# Altium PCB HB100_and_neo_m6.PcbDoc
Units mm, origin at the board's own origin, x right, y up, seen from the top; angles counter-clockwise.
Board outline 90.17 x 98.55 mm, 2 copper layers (Top Layer, Bottom Layer); 35 components, 23 nets, 163 pads, 8 vias.
Unrouted connection lines stored in the file: 3.
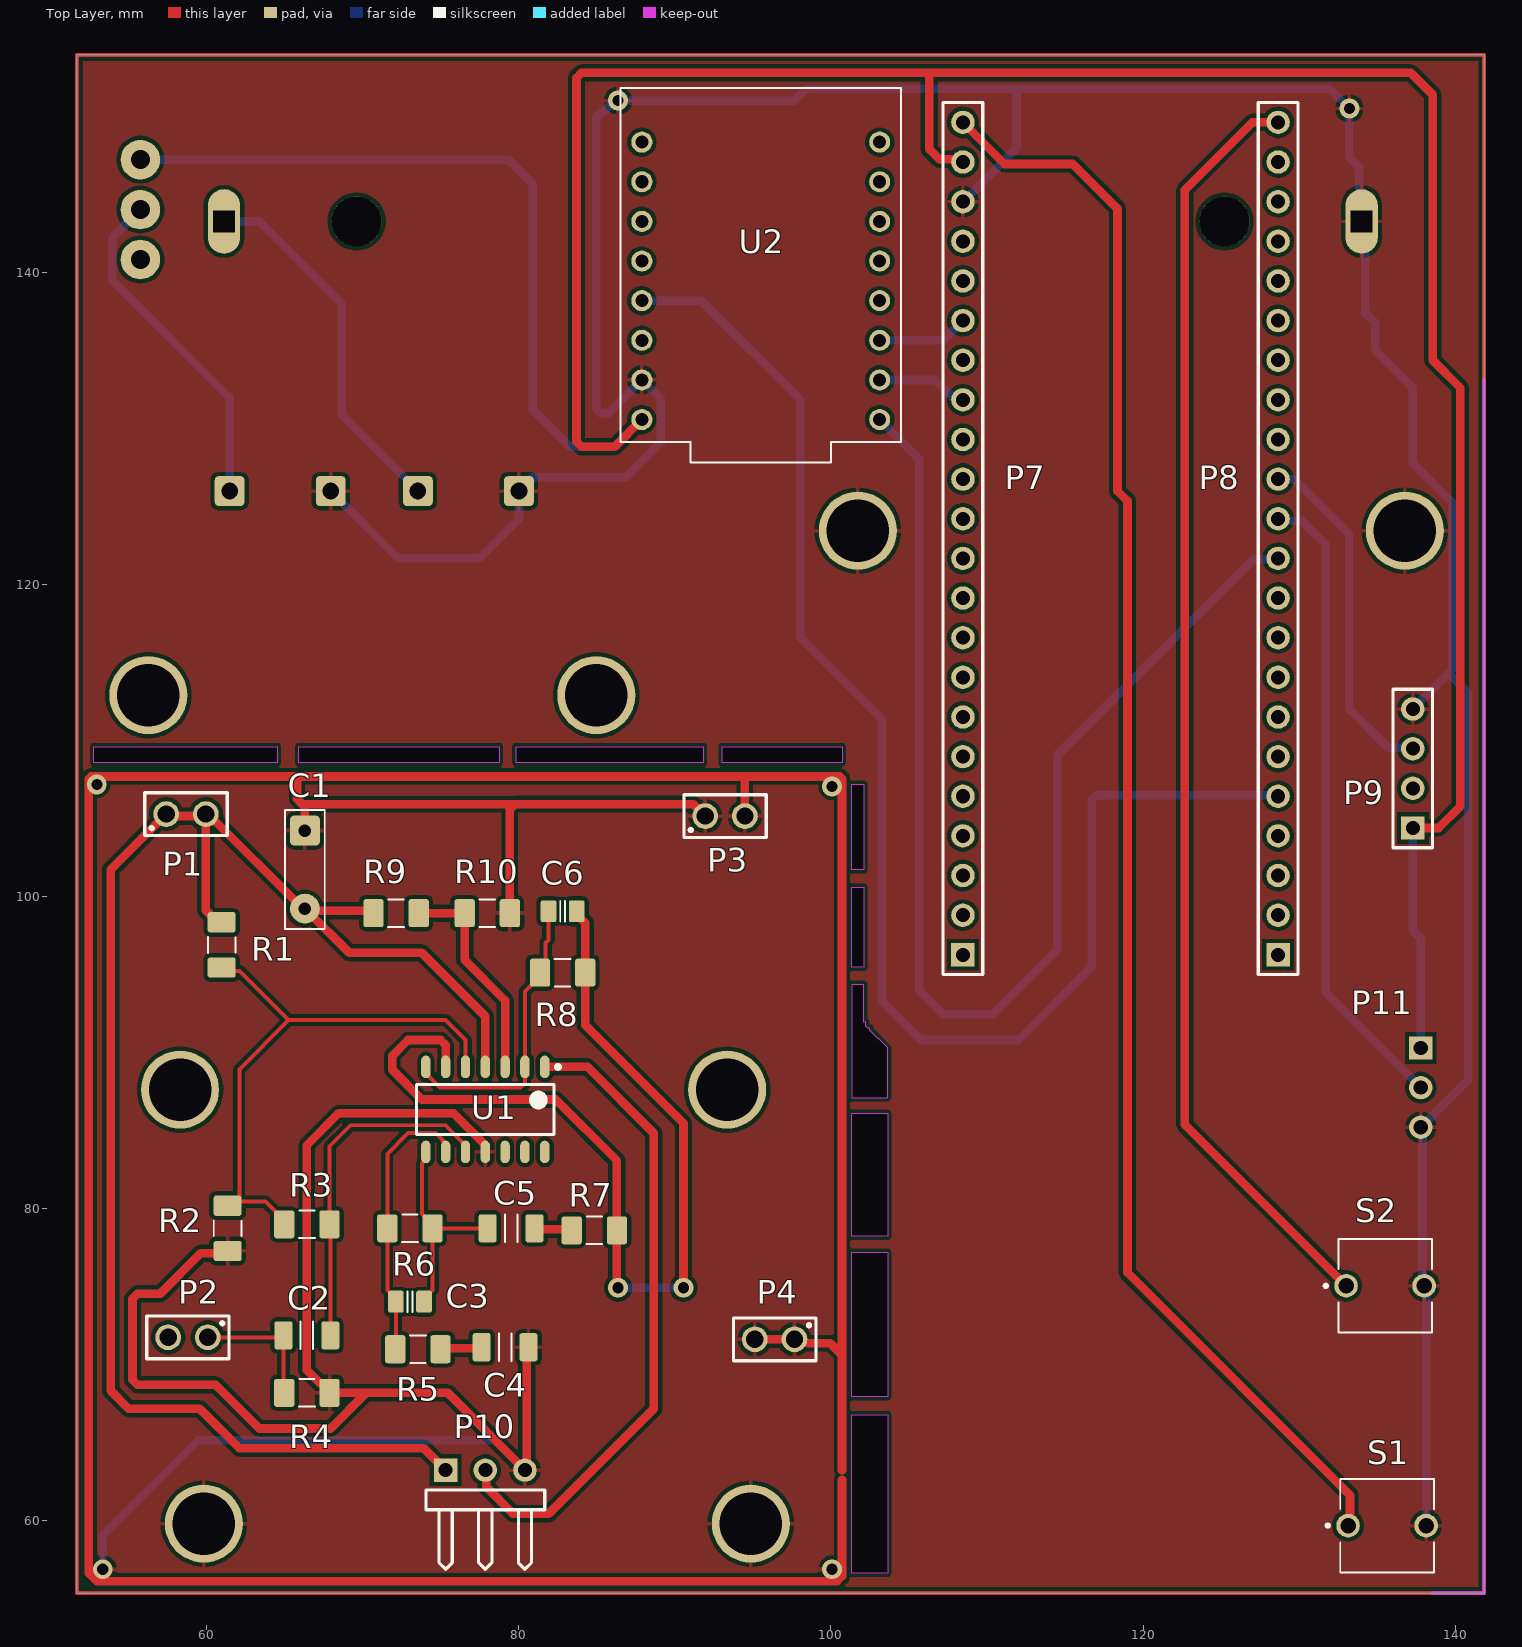
[diagram p0: Top Layer view]
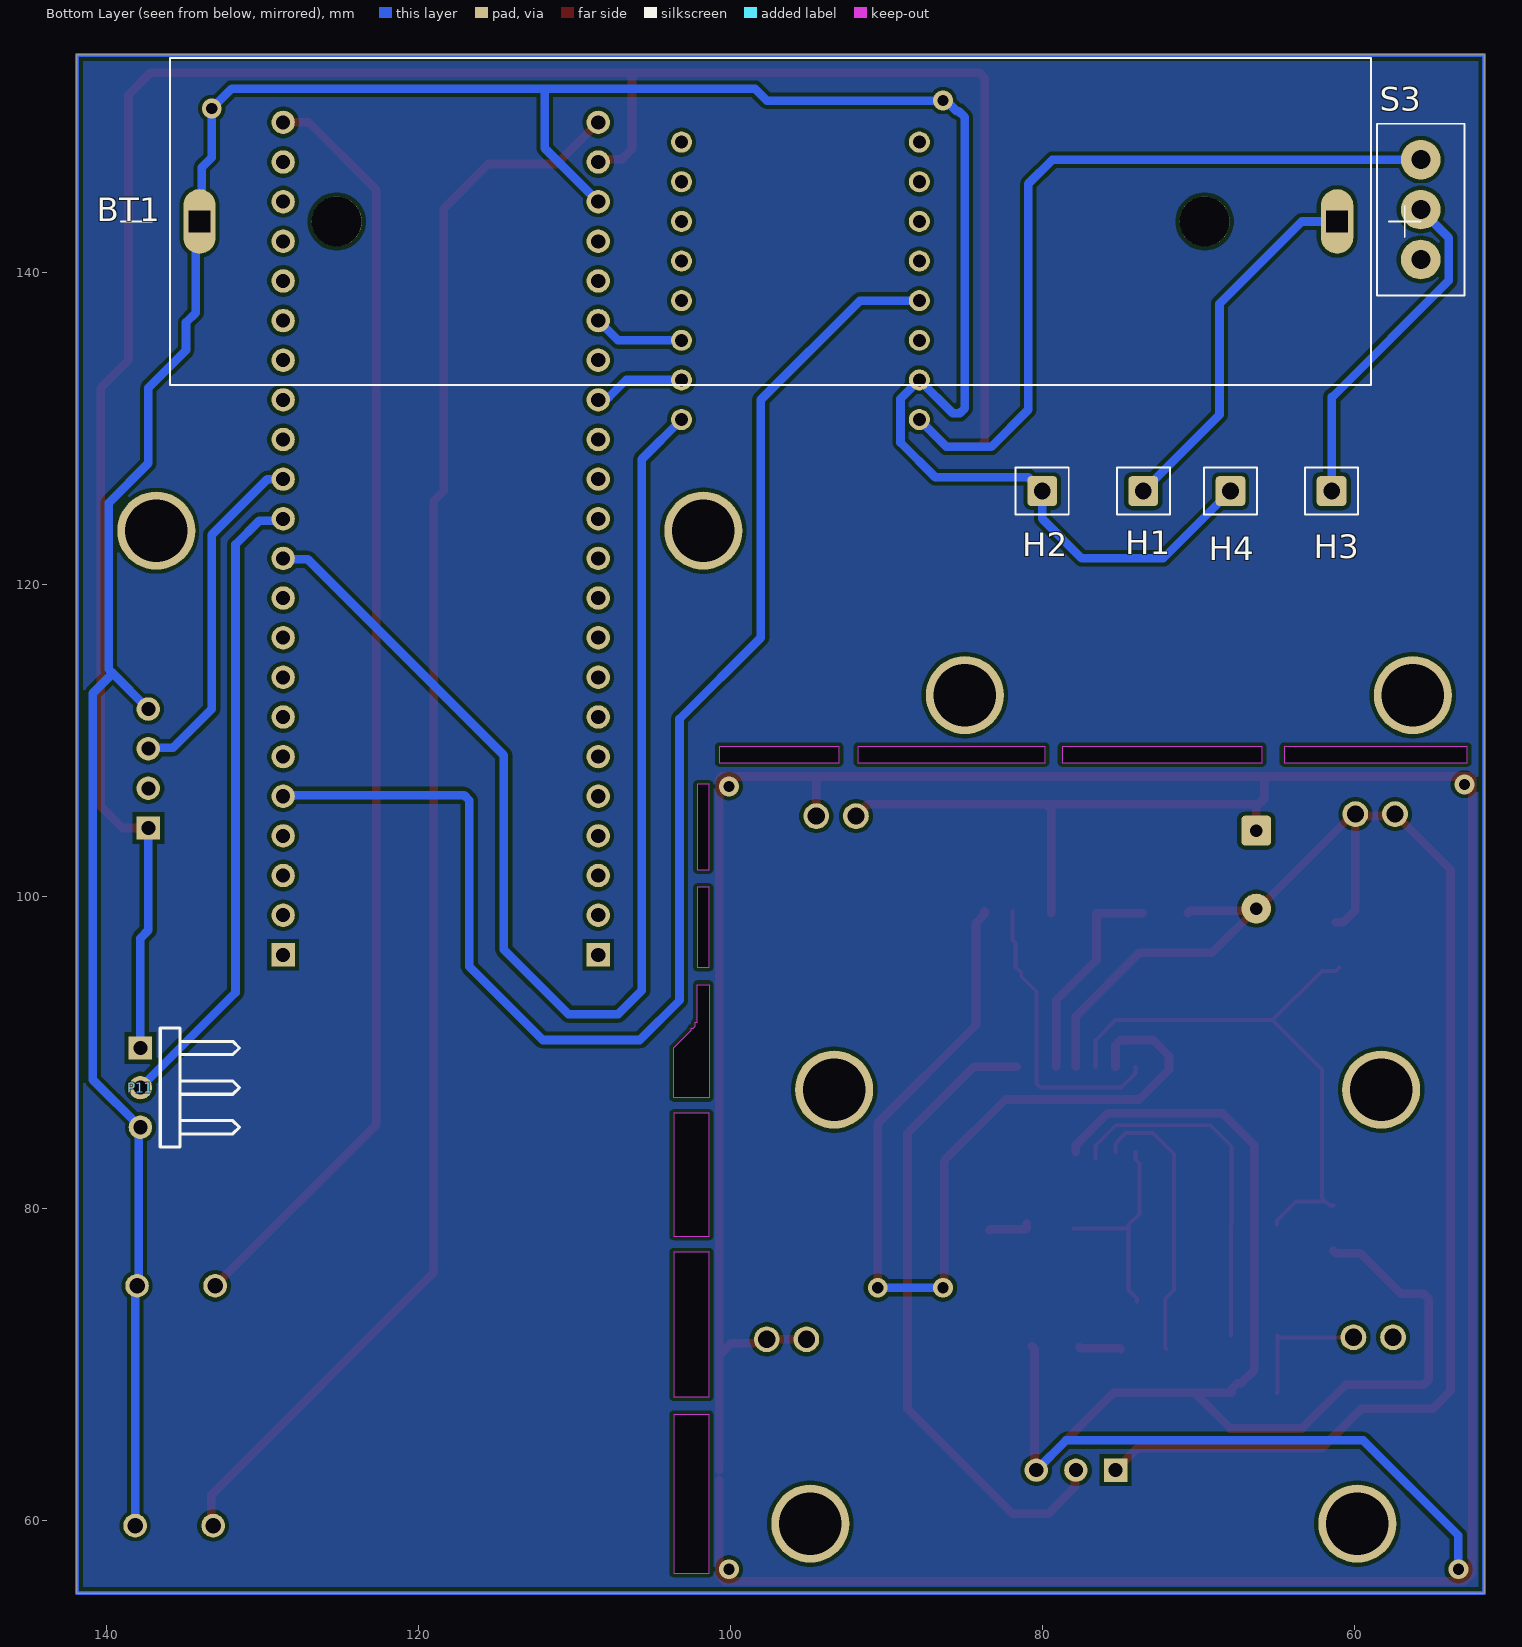
[diagram p1: Bottom Layer view, seen from below]

## Layer stack, top to bottom
Top Solder: solder mask 0.0102, Solder Resist, Dk 3.5
Top Layer: signal copper 0.0356
Dielectric 1: dielectric 0.32, FR-4, Dk 4.8
Bottom Layer: signal copper 0.0356
Bottom Solder: solder mask 0.0102, Solder Resist, Dk 3.5

## Board outline
51.689,55.372 51.689,153.924 141.859,153.924 141.859,55.372
cut-out: 101.346,107.188 102.108,107.188 102.108,101.727 101.346,101.727
cut-out: 101.346,100.584 102.108,100.584 102.108,95.472 101.346,95.472
cut-out: 101.346,66.802 103.632,66.802 103.632,56.642 101.346,56.642
cut-out: 101.346,77.216 103.632,77.216 103.632,67.945 101.346,67.945
cut-out: 101.346,86.106 103.632,86.106 103.632,78.232 101.346,78.232
cut-out: 100.711,109.601 100.711,108.585 93.027,108.585 93.027,109.601
cut-out: 91.821,109.601 91.821,108.585 79.819,108.585 79.819,109.601
cut-out: 78.74,109.601 78.74,108.585 65.913,108.585 65.913,109.601
cut-out: 64.516,109.601 64.516,108.585 52.768,108.585 52.768,109.601
cut-out: 101.346,94.361 101.346,87.122 103.632,87.122 103.632,90.297 102.489,91.44 102.489,91.567 102.362,91.567 102.235,91.694 102.235,91.948 102.108,91.948 102.108,94.361

## Design rules (kind name [scope] priority, off if disabled: settings)
Clearance [All] p1: gap=0.254 ignorepadtopadclearanceinfootprint=FALSE except(0: Arc-Hole Track-Hole SMDPad-Hole THPad-Hole Via-Hole Fill-Hole Poly-Hole Region-Hole Text-Hole)
PolygonConnect [All] p1: connectstyle=Relief reliefconductorwidth=0.254 reliefentries=4 polygonreliefangle="90 Angle" airgapwidth=0.254
RoutingVias [All] p1: holewidth=0.711 width=1.27 viastyle="Through Hole" minholewidth=0.711 minwidth=1.27 maxholewidth=0.711 maxwidth=1.27
SilkToSolderMaskClearance [IsText] p1: minsilkscreentomaskgap=0.254 clearancetoexposedcopper=TRUE
SolderMaskExpansion [All] p1: expansion=0.102 istentingtop=FALSE
Width [All] p1: maxlimit=0.554 minlimit=0.254 preferedwidth=0.254 minimp=50.000000 maximp=50.000000 favimp=50.000000
29 further rules are at their usual default settings.

## Components (designator, comment, footprint, x,y, rotation, side; value= is the part's Value field where it differs from the comment)
BT1 "BK-18650-PC2" BAT_BK-18650-PC2 97.409,143.256 r0 bottom
C1 "approved sub OK" CAPC500P450250X550 66.294,101.727 r270 top value=10n
C2 "approved sub OK" CAPC3216X180N 66.421,71.882 r0 top value=1u
C3 "approved sub OK" CAPC2012X135N 73.025,74.041 r0 top value=2n2
C4 "approved sub OK" CAPC3216X180N 79.121,71.12 r180 top value=4u7
C5 "approved sub OK" CAPC3216X180N 79.502,78.74 r0 top value=4u7
C6 "approved sub OK" CAPC2012X135N 82.804,99.06 r0 top value=2n2
H1 "Header 1" HEAD1 73.533,125.984 r180 bottom
H2 "Header 1" HEAD1 80.01,125.984 r180 bottom
H3 "Header 1" HEAD1 61.468,125.984 r180 bottom
H4 "Header 1" HEAD1 67.945,125.984 r180 bottom
P1 "Header 2" 61300211121 58.674,105.283 r0 top
P2 "Header 2" 61300211121 58.801,71.755 r180 top
P3 "Header 2" 61300211121 93.218,105.156 r0 top
P4 "Header 2" 61300211121 96.393,71.628 r180 top
P7 "Header 22" HDR1X22 108.458,96.266 r90 top
P8 "Header 22" HDR1X22 128.651,96.266 r90 top
P9 "*Header" HDR1X4 137.287,104.394 r90 top
P10 "Header 3H" HDR1X3H 75.311,63.246 r0 top
P11 "Header 3H" HDR1X3H 137.795,90.297 r270 bottom
R1 "Thick Film" RESC3216N_ZERO 60.96,96.901 r270 top value=100K
R2 "Thick Film" RESC3216N_ZERO 61.341,78.74 r270 top value=100K
R3 "Thick Film" RESC3216N_ZERO 66.421,78.994 r0 top value=100K
R4 "Thick Film" RESC3216N_ZERO 66.421,68.199 r0 top value=10K
R5 "Thick Film" RESC3216N_ZERO 73.533,70.993 r180 top value=10K
R6 "Thick Film" RESC3216N_ZERO 73.025,78.74 r0 top value=1M
R7 "Thick Film" RESC3216N_ZERO 84.836,78.613 r0 top value=10K
R8 "Thick Film" RESC3216N_ZERO 82.804,95.123 r180 top value=1M
R9 "Thick Film" RESC3216N_ZERO 72.136,98.933 r0 top value=10K
R10 "Thick Film" RESC3216N_ZERO 77.978,98.933 r0 top value=1K
S1 "BUTT-2" SW_BUTT-2 135.636,59.69 r0 top
S2 "BUTT-2" SW_BUTT-2 135.509,75.057 r0 top
S3 "ON-ON" SWITCH_SPDT_SLIDER 55.753,144.018 r270 bottom
U1 "LM324" SOIC127P600X175-14N-LM324 77.851,86.36 r270 top
U2 "ESP32-C3_SUPERMINI_TH" MODULE_ESP32-C3_SUPERMINI_TH 95.504,140.462 r180 top

## Footprints (in the part's own frame and the unit in brackets; to place one, negate y for a bottom-side part, rotate by r counter-clockwise, add the part's x,y. Pads: shape width x height; smd on the part's side, far side on the other; paste and mask are expansions set on the pad)
61300211121 [mm]
  round 1.65 hole 1.1: 1(-1.27,0) 2(1.27,0)
  silkscreen extent -2.64,-1.37 2.64,1.37
BAT_BK-18650-PC2 [mm]
  oval 2.07x4.14 hole 1.38 square mask+0.102: NEG(36.6,0) POS(-36.3,0)
  round 3.2 hole 3.2 unplated mask+0: ""(-27.805,0) ""(27.81,0)
  silkscreen extent -41.63,-10.49 41.63,10.49, body extent -38.48,-10.49 38.48,10.49, height 24.71
CAPC500P450250X550 [mm] "TDK FK24 radial ceramic capacitor"
  round 0.508 on Mech15: 0(0,0)
  rrect25% 1.905x1.905 hole 0.8: 1(-2.5,0)
  round 1.905 hole 0.8: 2(2.5,0)
  silkscreen extent -3.81,-1.27 3.81,1.27, body extent -2.8,-1 2.8,1, height 5.47
CAPC2012X135N [mm] "Chip Capacitor, Body 2.0x1.2mm, EIA 0805, IPC Medium Density"
  round 0.254 on Mech15: 0(0,0)
  rrect25% 1x1.4 smd: 1(-0.9,0) 2(0.9,0)
  Top Layer pour cut-out: -0.675,0.7 -0.475,0.9 0.475,0.9 0.675,0.7 0.675,-0.7 0.475,-0.9 -0.475,-0.9 -0.675,-0.7
  silkscreen extent -0.15,-0.65 0.15,0.65, body extent -1.1,-0.72 1.1,0.73, height 1.34
CAPC3216X180N [mm] "Chip Capacitor, Body 3.2x1.6mm, 1.8mm H, EIA 1206, IPC Medium Density"
  round 0.508 on Mech15: 0(0,0)
  rrect25% 1.15x1.8 smd: 1(-1.5,0) 2(1.5,0)
  silkscreen extent -0.4,-0.88 0.4,0.88, body extent -1.7,-0.9 1.7,0.9, height 1.8
HDR1X3H [mm] "Connector; Header; 3 Position; Right Angle"
  rect 1.5x1.5 hole 0.9: 1(0,0)
  round 1.5 hole 0.9: 2(2.54,0) 3(5.08,0)
  silkscreen extent -1.27,-6.35 6.35,-1.27, body extent -1.27,-7 6.35,1.27, height 4.33
HDR1X4 [mm] "Connector; Header; 4 Position"
  rect 1.5x1.5 hole 0.9: 1(0,0)
  round 1.5 hole 0.9: 2(2.54,0) 3(5.08,0) 4(7.62,0)
  silkscreen extent -1.27,-1.27 8.89,1.27, body extent -1.38,-1.22 9.03,1.28, height 3.22
HDR1X22 [mm] "Connector; Header; 22 Position"
  rect 1.5x1.5 hole 0.9: 1(0,0)
  round 1.5 hole 0.9: 2(2.54,0) 3(5.08,0) 4(7.62,0) 5(10.16,0) 6(12.7,0) 7(15.24,0) 8(17.78,0) 9(20.32,0) 10(22.86,0) 11(25.4,0) 12(27.94,0) 13(30.48,0) 14(33.02,0) 15(35.56,0) 16(38.1,0) 17(40.64,0) 18(43.18,0) 19(45.72,0) 20(48.26,0) 21(50.8,0) 22(53.34,0)
  silkscreen extent -1.27,-1.27 54.61,1.27
HEAD1 [mil] "Connector Socket with header, Single-row 1-position, 0.100\" pitch"
  rrect25% 75x75 hole 42: 1(0,0)
  silkscreen extent -67,-59 67,59, body extent -57,-50 57,50, height 408
MODULE_ESP32-C3_SUPERMINI_TH [mm]
  round 1.348 hole 0.84: 0(7.62,-7.88) 1(7.62,-5.34) 2(7.62,-2.8) 3(7.62,-0.26) 3.3(7.62,4.82) 4(7.62,2.28) 5(-7.62,9.9) 5V(7.62,9.9) 6(-7.62,7.36) 7(-7.62,4.82) 8(-7.62,2.28) 9(-7.62,-0.26) 10(-7.62,-2.8) 20(-7.62,-5.34) 21(-7.62,-7.88) G(7.62,7.36)
  silkscreen extent -9,-11.35 9,12.65, body extent -9,-11.35 9,12.65, height 4.16
RESC3216N_ZERO [mm] "Chip Resistor, Body 3.2x1.6mm, 1206, IPC Medium Density"
  round 0.508 on Mech15: 0(0,0)
  rrect25% 1.3x1.8 smd: 1(-1.45,0) 2(1.45,0)
  silkscreen extent -0.51,-0.89 0.51,0.89, body extent -1.62,-0.82 1.63,0.83, height 0.69
SOIC127P600X175-14N-LM324 [mm] "SOIC, 14-Leads, Body 8.65x3.90mm, Pitch 1.27mm, IPC Medium Density"
  oval 1.45x0.6 smd: 1(-2.725,3.81) 2(-2.725,2.54) 3(-2.725,1.27) 4(-2.725,0) 5(-2.725,-1.27) 6(-2.725,-2.54) 7(-2.725,-3.81) 8(2.725,-3.81) 9(2.725,-2.54) 10(2.725,-1.27) 11(2.725,0) 12(2.725,1.27) 13(2.725,2.54) 14(2.725,3.81)
  silkscreen extent -2.85,-4.4 1.6,4.79, body extent -3,-4.4 3,4.4, height 1.75
SW_BUTT-2 [mm]
  round 1.508 hole 1 mask+0.102: 1(-2.5,0) 2(2.5,0)
  silkscreen extent -3.9,-3 3,3, body extent -3,-3 3,3, height 5.1
SWITCH_SPDT_SLIDER [mil] "TE Connectivity SLS121PC04 SPDT slider"
  round 100 hole 48: 1(-126,0) 2(0,0) 3(126,0)
  silkscreen extent -217,-110 217,110, body extent -216,-110 217,110, height 394

## Part data
BT1: "Battery Holder (Open) 18650 1 Cell PC Pin", Package="DFN-14 MPD (Memory Protection Devices)", Check_prices=https://www.snapeda.com/parts/BK-18650-PC2/MPD/view-part/?ref=eda, MF="MPD (Memory", MP=BK-18650-PC2, SnapEDA_Link=https://www.snapeda.com/parts/BK-18650-PC2/MPD/view-part/?ref=snap
C1: library part CAPR_220n_Radial_5mm, "Capacitor Ceramic 220nF 10% 50V X7R radial 5mm lead spacing", Manufacturer 1="TDK Corporation", Manufacturer Part Number 1=FK24X7R1H224K, Operating Temperature="-55°C ~ 125°C", Package / Case="0.217\" L x 0.177\" W (5.50mm x 4.50mm) radial 5mm LS", Ratings="50V; X7R", Supplier Part Number 1=445-2855-ND, Tolerance=±10%, ComponentLink1Description="e4941_fk datasheet", ComponentLink1URL=http://www.tdk.co.jp/tefe02/e4941_fk.pdf, Material=ceramic, SCDType=spec, Supplier 1=Digi-Key
C2 C4 C5: library part "CAP C_1206", "Capacitor SMD Cer 220nF 10% 16V X7R 1206", Manufacturer 1=Murata, Manufacturer Part Number 1=GRM319R71C224KA01D, Package / Case="1206 (3216 metric)", Ratings="16V; X7R", Supplier Part Number 1=81-GRM426X224K016D, Tolerance=±10%, SCDType=spec, Supplier 1=Mouser
C3 C6: library part "CAP C_0805", "Capacitor SMD Cer 1.8nF 10% 50V X7R 0805", Manufacturer 1="AVX Corporation", Manufacturer Part Number 1=08055C182KAT2A, Operating Temperature="-55°C ~ 125°C", Package / Case="0805 (2012 metric)", Ratings="50V; X7R", Supplier Part Number 1=478-1374-1-ND, Tolerance=±10%, SCDType=source*, Supplier 1=Digi-Key
H1 H2 H3 H4: "Header, 1-Pin, Right Angle", Published=6-May-2014, Publisher="Cynetik Group", Revised="Zion Blue"
P1 P2 P3 P4: library part 6130XX11121_61300211121, Package=None, Availability=Unavailable, MF="{'manufacturer': u'Wurth Electronics'}", MP=61300211121, Price=None
P7 P8: "Header, 22-Pin", LatestRevisionDate=17-Jul-2002, LatestRevisionNote="Re-released for DXP Platform.", Publisher="Altium Limited"
P9: library part "Header 4", "Header, 4-Pin, Right Angle", LatestRevisionDate=17-Jul-2002, LatestRevisionNote="Re-released for DXP Platform.", Publisher="Altium Limited"
P10 P11: "Header, 3-Pin, Right Angle", LatestRevisionDate=17-Jul-2002, LatestRevisionNote="Re-released for DXP Platform.", Publisher="Altium Limited"
R1 R2 R3 R4 R5 R6 R7 R8 R9 R10: library part RES_1206, "Resistor SMD chip 0.0 Ohm 0.25W 1206", Manufacturer 1=Vishay/Dale, Manufacturer Part Number 1=CRCW12060000Z0EA, Package / Case="1206 (3216 metric)", Ratings=1/4W, Supplier Part Number 1=541-0.0ECT-ND, Tolerance=±5%, SCDType=spec*\?, Supplier 1=Digi-Key
S1 S2: "Tactile Switches MINI PUSH BUTTON SWITCH 2-PIN QTY. 4", Package=None, Check_prices=https://www.snapeda.com/parts/BUTT-2/Gravitech/view-part/?ref=eda, MF=Gravitech, MP=BUTT-2, SnapEDA_Link=https://www.snapeda.com/parts/BUTT-2/Gravitech/view-part/?ref=snap
S3: library part SW_THD_SPDT_On-On, "Switch THD vertical toggle SPDT", Contact Rating @ Voltage="0.25A @ 125VAC", Manufacturer 1="TE Connectivity", Manufacturer Part Number 1=SLS121PC04, Supplier Part Number 1=450-1598-ND, Circuit=SPDT, Mounting Type="PCB mount", SCDType=spec, Supplier 1=Digi-Key, Switch Function=On-On
U2: "Super tiny ESP32-C3 board", Package=Package, Check_prices=https://www.snapeda.com/parts/ESP32-C3%20SuperMini_TH/Espressif+Systems/view-part/?ref=eda, MF="Espressif Systems", MP="ESP32-C3 SuperMini_TH", SnapEDA_Link=https://www.snapeda.com/parts/ESP32-C3%20SuperMini_TH/Espressif+Systems/view-part/?ref=snap

## Free pads (board coordinates)
  round 5 hole 4: 1(58.293,87.63) 1(59.817,59.817) 2(93.345,87.63) 2(94.869,59.817) 3(101.727,123.444) 4(136.779,123.444) 5(56.261,112.903) 6(84.963,112.903)

## Via types
v1: diameter 1.27, hole 0.711, Top Layer to Bottom Layer, 8 vias

## Nets (pads, with @x,y where several pads share a name; then routed paths per layer and width w, separated by ;. In a path a pad name is that pad's centre, name@x,y a point inside that pad or via, vN(x,y) a via of type N, cw(c..) or ccw(c..) an arc to the next point about the centre after c; other vN are vias at no path point)
3_01_UART_RX: P8.13 P9.3 | length 22.3
  Bottom Layer w0.554: P8.13 129.667,126.746 133.223,123.19 133.223,112.014 135.706,109.531 137.23,109.531 P9.3
3_02_MISO: P7.17 U2.7 | length 5.9
  Bottom Layer w0.554: U2.7 107.194,135.642 P7.17
3_08_MOSI: P7.15 U2.6 | length 5.9
  Bottom Layer w0.554: U2.6 106.674,133.102 107.769,132.007 108.277,132.007 P7.15
3_10_SCLK: P8.5 U2.4 | length 92.6
  Bottom Layer w0.554: U2.4 91.688,138.182 98.044,131.826 98.044,116.586 103.251,111.379 103.251,93.345 105.791,90.805 112.014,90.805 116.713,95.504 116.713,106.158 117.038,106.483 128.594,106.483 P8.5
3_47_NSS: P8.11 U2.5 | length 80.6
  Bottom Layer w0.554: U2.5 105.664,128.022 105.664,93.98 107.188,92.456 110.363,92.456 114.508,96.601 114.508,109.047 127.07,121.609 128.594,121.609 P8.11
3_48_ADC: P8.12 P11.2 | length 41.1
  Bottom Layer w0.554: P8.12 128.778,124.079 130.175,124.079 131.699,122.555 131.699,93.853 P11.2
GND: BT1.NEG C1.1 C4.1 H2.1 H4.1 P3.1 P3.2 P4.1 P4.2 P7.20 P9.4 P10.3 P11.3 pad.1@59.817,59.817 pad.2@94.869,59.817 pad.3 pad.4 R2.2 R4.2 R10.2 S1.2 S2.2 U1.11 U2.G | length 570.1
  Top Layer w0.254: v1@52.451,107.547 v1@52.6,107.696 ; 100.562,107.696 100.711,107.547
  Top Layer w0.554: v1@52.451,107.547 52.451,56.642 52.959,56.134 100.386,56.134 100.711,56.459 100.711,62.611 ; v1@52.6,107.696 94.488,107.696 ; R2.2 61.204,77.153 59.627,77.153 57.023,74.549 55.57,74.549 55.245,74.224 55.245,69.032 55.57,68.707 60.579,68.707 63.373,65.913 67.945,65.913 70.231,68.199 ; 65.786,107.569 65.786,106.259 66.127,105.918 ; C1.1 66.294,105.751 66.127,105.918 ; U1.11 77.851,84.072 77.828,84.095 77.828,84.097 75.819,86.106 68.453,86.106 66.421,84.074 66.421,69.649 67.248,68.822 67.498,68.822 67.871,68.449 R4.2 70.231,68.199 ; R10.2 79.428,105.59 79.756,105.918 ; C4.1@80.684,71.183 C4.1 80.506,71.005 80.506,63.361 P10.3 75.438,68.199 70.231,68.199 ; P3.1 91.186,105.918 79.756,105.918 ; P3.2 94.488,107.696 ; P4.2@95.059,71.564 P4.2 P4.2@95.377,71.628 ; P4.2@95.631,71.628 P4.1 97.873,71.418 98.491,71.418 98.536,71.374 99.949,71.374 100.711,70.612 ; 100.562,107.696 94.488,107.696 ; 100.711,63.246 100.711,70.612 ; 100.711,107.547 100.711,70.612 ; P7.20@108.202,144.526 P7.20 ; 66.127,105.918 79.756,105.918
  Bottom Layer w0.554: v1(53.34,56.896) 53.34,59.055 59.436,65.151 78.486,65.151 P10.3 ; H4.1 72.263,121.666 77.476,121.666 80.01,124.201 H2.1 80.899,126.873 86.868,126.873 89.089,129.094 89.089,131.897 U2.G 85.746,130.964 85.288,130.964 84.963,131.289 84.963,149.935 85.355,150.327 85.49,150.327 86.166,151.003 97.656,151.003 98.418,151.765 111.887,151.765 ; P7.20 111.887,147.955 111.887,151.765 ; P9.4 139.573,114.3 ; S1.2 138.136,74.93 S2.2 137.902,75.164 137.902,85.11 P11.3 140.843,88.265 140.843,113.03 139.573,114.3 ; 111.887,151.765 131.953,151.765 v1(133.223,150.495) 133.223,147.355 133.858,146.72 133.858,143.407 134.239,143.026 134.239,137.414 134.87,136.783 134.87,135.005 137.287,132.588 137.287,127.762 139.827,125.222 139.827,114.554 139.573,114.3
  other v1: 100.076,56.896 100.076,107.061 52.959,107.188 86.36,151.003
NetBT1_POS: BT1.POS H1.1 | length 23.8
  Bottom Layer w0.554: BT1.POS 63.387,143.256 68.651,137.992 68.651,130.866 H1.1
NetC2_1: C2.1 P2.1 P2.2 R4.1 | length 8.6
  Top Layer w0.254: P2.1 64.794,71.755 C2.1 64.921,68.249 R4.1
NetC2_2: C2.2 R3.2 U1.10 | length 22.8
  Top Layer w0.254: C2.2 67.921,78.944 R3.2 67.871,84 69.215,85.344 75.297,85.344 76.581,84.06 U1.10 U1.10@76.581,83.21
NetC3_1: C3.1 R5.2 R6.1 U1.9 | length 17.9
  Top Layer w0.254: R5.2 72.125,71.035 C3.1 72.125,74.241 71.575,74.791 R6.1 71.575,83.513 72.898,84.836 74.676,84.836 75.154,84.358 75.154,84.311 75.311,84.154 U1.9
NetC3_2: C3.2 C5.1 R6.2 U1.8 | length 13.7
  Top Layer w0.254: C3.2 73.925,74.241 74.475,74.791 R6.2 ; U1.8 74.041,83.142 73.787,82.888 73.787,79.662 74.475,78.974 R6.2 ; C5.1 R6.2
NetC4_2: C4.2 R5.1 | length 2.7
  Top Layer w0.554: R5.1 75.046,71.056 77.558,71.056 C4.2
NetC5_2: C5.2 R7.1 | length 2.8
  Top Layer w0.554: C5.2@81.002,79.065 C5.2 81.065,78.677 83.323,78.677 R7.1
NetC6_1: C6.1 R8.2 U1.2 U1.7 | length 18.9
  Top Layer w0.254: U1.7 74.041,88.66 74.944,87.757 80.115,87.757 80.391,88.033 U1.2 80.391,93.91 81.354,94.873 R8.2 81.715,95.483 81.715,97.025 81.904,97.215 C6.1
NetC6_2: C6.2 R7.2 R8.1 U1.6 | length 62.4
  Top Layer w0.554: U1.6 75.311,90.48 74.986,90.805 72.898,90.805 71.882,89.789 71.882,88.9 73.787,86.995 82.37,86.995 86.286,83.079 R7.2 86.286,75.004 v1(86.36,74.93) ; C6.2 83.704,98.86 84.254,98.31 R8.1 84.254,91.768 90.551,85.471 v1(90.551,74.93)
  Bottom Layer w0.554: v1(86.36,74.93) v1(90.551,74.93)
NetH3_1: H3.1 S3.2 | length 21.9
  Bottom Layer w0.554: S3.2 53.952,142.217 53.952,139.469 61.404,132.017 ; H3.1 61.468,132.017
NetP7_22: P7.22 S1.1 | length 102.8
  Top Layer w0.554: P7.22 111.125,146.939 115.499,146.939 118.364,144.074 118.364,125.984 118.999,125.349 118.999,75.906 133.263,61.642 S1.1@133.263,59.69
NetP8_22: P8.22 S2.1 | length 82.3
  Top Layer w0.554: P8.22 127,149.606 122.682,145.288 122.682,85.384 S2.1
NetP10_2: P10.2 U1.1 | length 41.7
  Top Layer w0.554: P10.2 77.907,63.19 77.907,62.174 79.629,60.452 81.915,60.452 88.646,67.183 88.646,84.836 84.397,89.085 U1.1
NetR1_2: R1.2 R2.1 R3.1 U1.5 | length 36.8
  Top Layer w0.254: R1.2 61.175,95.236 62.092,95.236 65.253,92.075 ; R2.1 61.572,80.19 R2.1@61.877,80.495 ; R3.1 64.971,79.244 63.754,80.461 61.877,80.461 R2.1@61.877,80.495 ; U1.5 76.581,90.805 75.311,92.075 65.253,92.075 ; R2.1@61.877,80.495 62.092,80.71 62.092,88.914 65.253,92.075
NetR9_2: R9.2 R10.1 U1.3 | length 13.9
  Top Layer w0.554: R9.2 R10.1 76.528,95.938 79.121,93.345 U1.3
VCC: C1.2 P1.1 P1.2 P7.21 P9.1 P10.1 P11.1 R1.1 R9.1 S3.1 U1.4 U2.5V | length 307.8
  Top Layer w0.554: P1.1 53.848,101.727 53.848,68.326 54.991,67.183 59.563,67.183 62.103,64.643 73.914,64.643 P10.1 P10.1@75.057,63.246 ; P1.1@57.531,105.156 P1.2@59.944,105.156 ; R1.1@61.21,98.351 R1.1 60.71,98.351 59.944,99.117 P1.2@59.944,105.156 ; R9.1 70.539,99.08 C1.2@66.441,99.08 ; U1.4 77.851,92.329 73.787,96.393 69.128,96.393 C1.2@66.441,99.08 ; U2.5V 86.139,128.817 84.018,128.817 83.693,129.141 83.693,152.456 84.018,152.781 106.299,152.781 ; P7.21 108.277,147.247 106.951,147.247 106.299,147.899 106.299,152.781 ; P9.1 138.938,104.394 140.335,105.791 140.335,132.588 138.557,134.366 138.557,151.384 137.16,152.781 106.299,152.781 ; P1.2@59.944,105.156 P1.2 60.091,105.283 66.147,99.227 C1.2 C1.2@66.441,99.08
  Bottom Layer w0.554: S3.1 79.35,147.218 80.899,145.669 80.899,131.191 83.266,128.824 86.146,128.824 U2.5V ; P9.1 137.287,97.836 137.795,97.328 P11.1
pads on no net: BT1. C1.0 C2.0 C3.0 C4.0 C5.0 C6.0 P7.1 P7.2 P7.3 P7.4 P7.5 P7.6 P7.7 P7.8 P7.9 P7.10 P7.11 P7.12 P7.13 P7.14 P7.16 P7.18 P7.19 P8.1 P8.2 P8.3 P8.4 P8.6 P8.7 P8.8 P8.9 P8.10 P8.14 P8.15 P8.16 P8.17 P8.18 P8.19 P8.20 P8.21 P9.2 R1.0 R2.0 R3.0 R4.0 R5.0 R6.0 R7.0 R8.0 R9.0 R10.0 S3.3 U1.12 U1.13 U1.14 U2.0 U2.1 U2.2 U2.3 U2.3.3 U2.8 U2.9 U2.10 U2.20 U2.21
copper on no net: | length 754.9
  Top Layer w0.254: 51.689,55.372 141.859,55.372 141.859,153.924 51.689,153.924 51.689,55.372
  Bottom Layer w0.254: 51.689,55.372 141.859,55.372 141.859,153.924 51.689,153.924 51.689,55.372

## Polygon pours and split planes (outlines as drawn)
no net on Bottom Layer "NONET_L02_P001" (solid, pour order 1): 51.689,153.924 141.859,153.924 141.859,55.372 51.689,55.372
GND on Top Layer "GND_L01_P000" (solid, pour order 0): 51.689,153.924 141.859,153.924 141.859,55.372 51.689,55.372

## Keep-outs
Top Layer:
  lines w0.254: 138.557,55.372 141.859,55.372 141.859,86.36 141.859,133.096